# Altium PCB Adafruit Feather M0 Basic rev C.PcbDoc
Units mil, origin at the board's own origin, x right, y up, seen from the top; angles counter-clockwise.
Board outline 2000 x 900 mil, 2 copper layers (Top, Bottom), stack 61.811 mil thick; 37 components, 86 nets, 154 pads, 99 vias.
Unrouted connection lines stored in the file: 2.
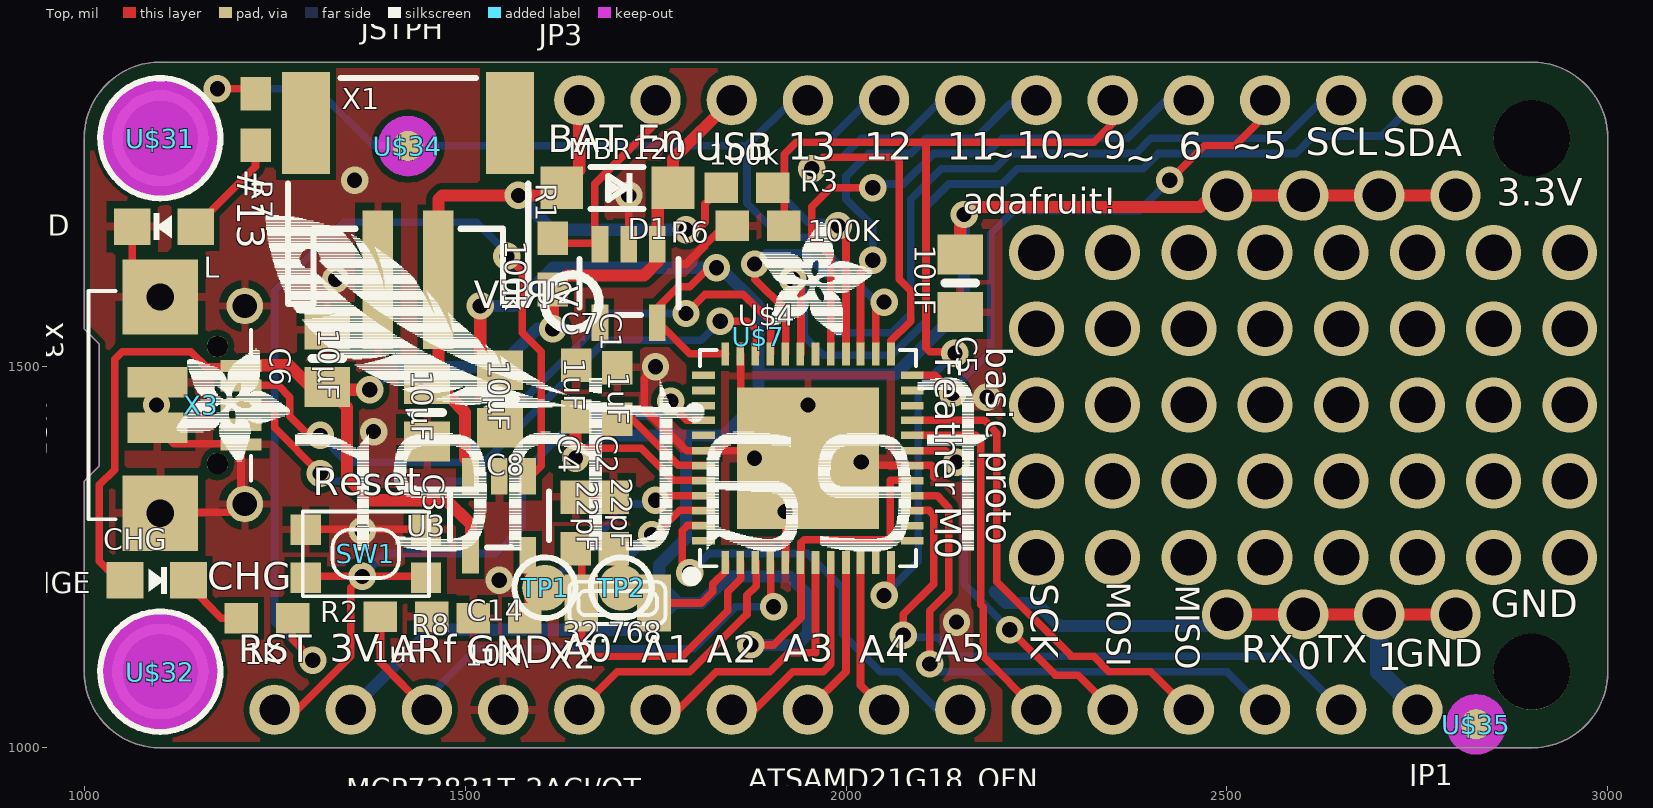
[diagram p0: Top view]
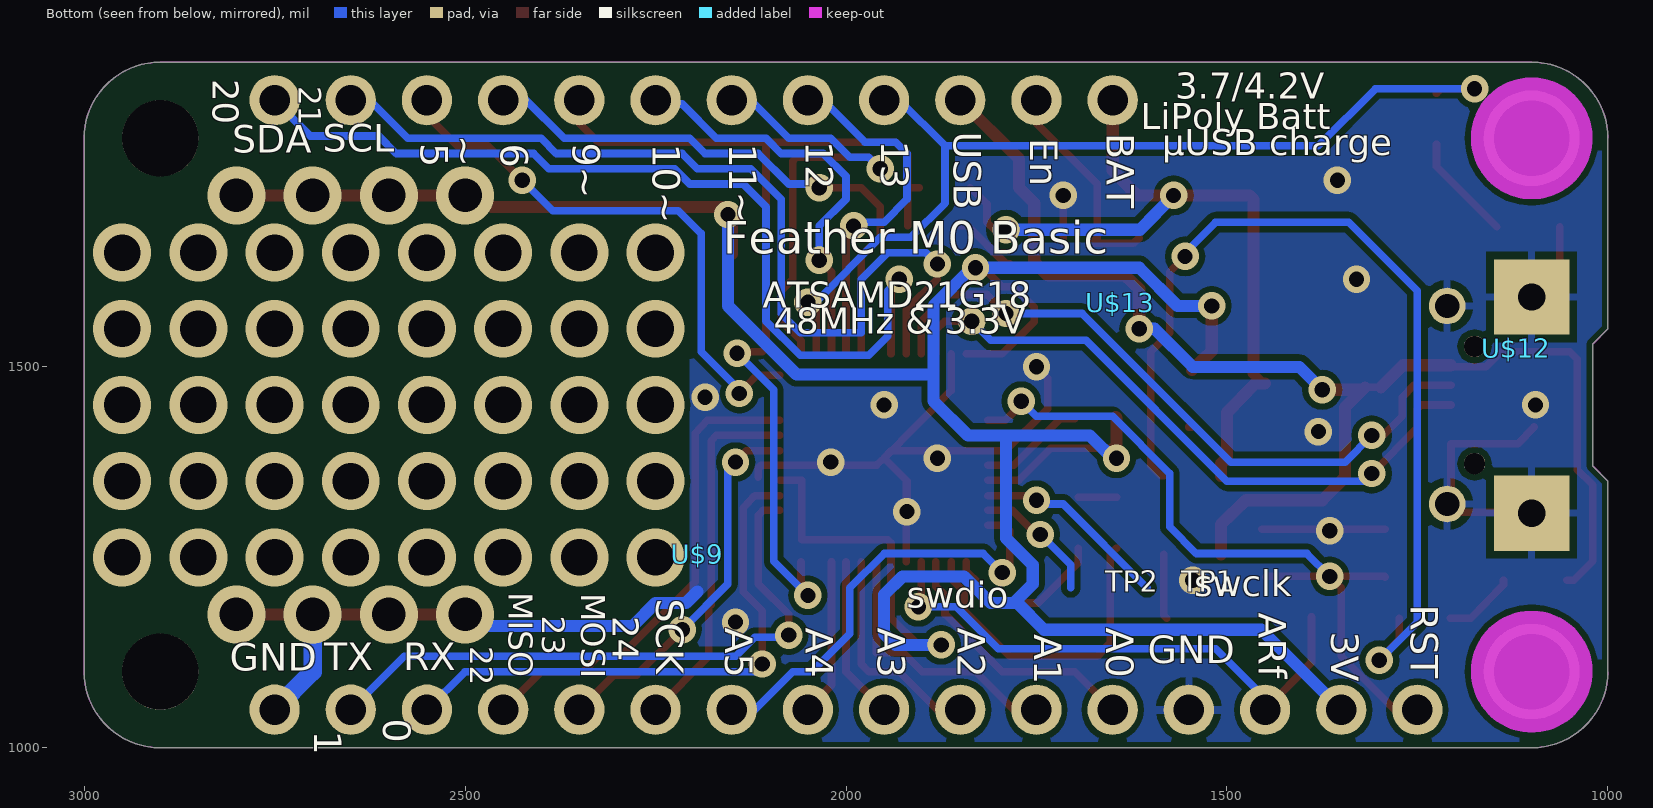
[diagram p1: Bottom view, seen from below]

## Layer stack, top to bottom
Top Solder: solder mask 0.4, Solder Resist, Dk 3.5
Top: signal copper 1.378
Dielectric 1: core 59.0551, FR-4, Dk 4.8
Bottom: signal copper 1.378
Bottom Solder: solder mask 0.4, Solder Resist, Dk 3.5

## Board outline
1100,1000 2900,1000 ccw(c2900,1100) 3000,1100 3000,1800 ccw(c2900,1800) 2900,1900 1100,1900 ccw(c1100,1800) 1000,1800 1000,1550 1020,1530 1020,1370 1000,1350 1000,1100 ccw(c1100,1100)

## Design rules (kind name [scope] priority, off if disabled: settings)
Clearance [All] p1: gap=8 except(0: SMDPad-SMDPad SMDPad-THPad SMDPad-Via)
Clearance "Clearance (Same Net)" [All] p2: gap=0 except(8: SMDPad-SMDPad SMDPad-THPad SMDPad-Via)
HoleSize HoleSize_1 [All] p1: absolutevalues=TRUE maxlimit=100000 minlimit=15.5 maxpercent=80.000 minpercent=20.000
HoleSize [All] p2: absolutevalues=TRUE maxlimit=100 minlimit=1 maxpercent=80.000 minpercent=20.000
HoleToHoleClearance mdViaViaSameLayer [All] p1: gap=8 allowstackedmicrovias=TRUE
HoleToHoleClearance [All] p2: gap=10 allowstackedmicrovias=TRUE
PasteMaskExpansion mlMinCreamFrame [All] p1: expansion=0
PasteMaskExpansion [All] p2: expansion=0
PolygonConnect ThermalVias [IsVia] p1: connectstyle=Direct reliefconductorwidth=10 reliefentries=4 polygonreliefangle="90 Angle" airgapwidth=10
PolygonConnect [All] p2: connectstyle=Relief reliefconductorwidth=10 reliefentries=4 polygonreliefangle="90 Angle" airgapwidth=10
RoutingVias [All] p1: holewidth=28 width=50 viastyle="Through Hole" minholewidth=28 minwidth=50 maxholewidth=28 maxwidth=50
SilkToSilkClearance [All] p1 off: silktosilkclearance=10
SilkToSolderMaskClearance [IsPad] p1 off: minsilkscreentomaskgap=10 clearancetoexposedcopper=TRUE
SolderMaskExpansion mlMinStopFrame [All] p1: expansion=2
SolderMaskExpansion [All] p2: expansion=4
Width Width_1 [All] p1: maxlimit=100000 minlimit=8 preferedwidth=10
Width [All] p2: maxlimit=10 minlimit=10 preferedwidth=10
25 further rules are at their usual default settings.

## Components (designator, comment, footprint, x,y, rotation, side; value= is the part's Value field where it differs from the comment)
C1 "1uF" 0603-NO 1700,1465 r90.02 top
C2 "22pF" 0603-NO 1695,1295 r90.02 top
C3 "10µF" 0805-NO 1450,1440 r270 top
C4 "22pF" 0603-NO 1645,1295 r90.02 top
C5 "10uF" 0805-NO 2150,1610 r270 top
C6 "10µF" 0805-NO 1319,1511 r90.02 top
C7 "1uF" 0603-NO 1646,1468 r90.02 top
C8 "10µF" 0805-NO 1546,1458 r270 top
C14 "1uF" 0603-NO 1422,1172 r0 top
CHG "ORANGE" CHIPLED_0805_NOOUTLINE 1095,1220 r270 top
D1 "MBR120" SOD-123 1700,1735 r180.01 top
JP1 "" 1X16_ROUND 2000,1050 r180.01 top
JP3 "" 1X12_ROUND 2200,1850 r0 top
L "RED" CHIPLED_0805_NOOUTLINE 1105,1684 r90.02 top
R1 "100k" 0603-NO 1615,1635 r90.02 top
R2 "1K" 0603-NO 1240,1170 r0 top
R3 "100k" 0603-NO 1870,1735 r0 top
R6 "100K" 0603-NO 1885,1685 r180.01 top
R7 "2.2K" 0603-NO 1225,1825 r270 top
R8 "10K\" 0603-NO 1545,1170 r180.01 top
SW1 "" KMR2 1370,1255 r180.01 top
TP1 "" TESTPOINT_ROUND_1.5MM 1605,1210 r180 bottom
TP2 "" TESTPOINT_ROUND_1.5MM 1705,1210 r180 bottom
U2 "SPX3819-3.3" SOT23-5 1715,1610 r180.01 top
U3 "MCP73831T-2ACI/OT" SOT23-5 1545,1305 r180.01 top
U$4 "ATSAMD21G18_QFN" TQFN48_7MM 1950,1380 r0 top
U$7 "" ADAFRUIT_3.5MM 1885,1540 r0 top
U$9 "" FEATHERLOGO 2195,1255 r180 bottom
U$12 "" ADAFRUIT_3.5MM 1120,1525 r359.99 bottom
U$13 "" PCBFEAT-REV-040 1640,1585 r180 bottom
U$31 "" MOUNTINGHOLE_2.5_PLATED 1100,1800 r270 top
U$32 "" MOUNTINGHOLE_2.5_PLATED 1100,1100 r270 top
U$34 "" FIDUCIAL_1MM 1425,1790 r270 top
U$35 "" FIDUCIAL_1MM 2827,1031 r270 top
X1 "JSTPH" JSTPH2 1425,1760 r0 top
X2 "32.768" XTAL3215 1700,1190 r0 top
X3 "microUSB" 4UCONN_20329_V2 1175,1450 r270 top

## Footprints (in the part's own frame and the unit in brackets; to place one, negate y for a bottom-side part, rotate by r counter-clockwise, add the part's x,y. Pads: shape width x height; smd on the part's side, far side on the other; paste and mask are expansions set on the pad)
1X12_ROUND [mil] "1X12_ROUND"
  round 66 hole 40: 1(-550,0) 2(-450,0) 3(-350,0) 4(-250,0) 5(-150,0) 6(-50,0) 7(50,0) 8(150,0) 9(250,0) 10(350,0) 11(450,0) 12(550,0)
1X16_ROUND [mil] "1X16_ROUND"
  round 66 hole 40: 1(-750,0) 2(-650,0) 3(-550,0) 4(-450,0) 5(-350,0) 6(-250,0) 7(-150,0) 8(-50,0) 9(50,0) 10(150,0) 11(250,0) 12(350,0) 13(450,0) 14(550,0) 15(650,0) 16(750,0)
4UCONN_20329_V2 [mil] "4UCONN_20329_V2"
  round 28 hole 28: 1(-76.77,0) 1(77,0)
  rect 40x79 smd: BASE@1(-29.53,-78.74) BASE@2(30,-78.74)
  rect 16x54 smd: D+(0,31) D-(-25.59,31) GND(52,31) ID(26,31) VBUS(-51.18,31)
  round 48 hole 32: SPRT@1(-129.92,36) SPRT@2(130,36)
  rect 99x99 hole 36: SPRT@3(-141.73,-74.8) SPRT@4(142,-74.8)
  silkscreen extent -150,-169 150,44
0603-NO [mil] "0603-NO"
  rect 44x40 smd: 1(-33.46,0) 2(34,0)
0805-NO [mil] "0805-NO"
  rect 52x60 smd: 1(-37.4,0) 2(38,0)
  silkscreen extent 0,-20 0,20
ADAFRUIT_3.5MM [mil] "ADAFRUIT_3.5MM"
  silkscreen extent 1,1 150,150
CHIPLED_0805_NOOUTLINE [mil] "CHIPLED_0805_NOOUTLINE"
  rect 48x48 smd: A(0,-41.34) C(0,42)
  silkscreen extent -17,-10 18,14
FEATHERLOGO [mil] "FEATHERLOGO"
FIDUCIAL_1MM [mil] "FIDUCIAL_1MM"
  rrect100% 40x40 smd: 1(0,0)
  Top keep-out lines w20: 0,-29.53 cw(c0,0) -29.53,0 cw(c0.24,0.24) 0,30 cw(c0,0) 30,0 cw(c0.24,0.24) 0,-29.53
JSTPH2 [mil] "JSTPH2"
  rect 40x182 smd: 1(-39.37,-145.67) 2(40,-145.67)
  rect 63x134 smd: NC1(-133.86,60) NC2(134,60)
  silkscreen extent -157,-177 158,119
KMR2 [mil] "KMR2"
  rect 40x40 smd: 1(79,32) 2(79,-31.5) 3(-78.74,32) 4(-78.74,-31.5)
  silkscreen extent -83,-55 83,56
MOUNTINGHOLE_2.5_PLATED [mil] "MOUNTINGHOLE_2.5_PLATED"
  round 126 hole 99: P$1(0,0)
  Top keep-out lines w80: 40,0 ccw(c0,0) 40,0
  Bottom keep-out lines w80: 40,0 ccw(c0,0) 40,0
  silkscreen extent -79,-79 79,79
PCBFEAT-REV-040 [mil] "PCBFEAT-REV-040"
SOD-123 [mil] "SOD-123"
  rect 56x56 smd: A(73,0) C(-72.83,0)
  silkscreen extent -34,-28 35,28
SOT23-5 [mil] "SOT23-5"
  rect 22x48 smd: 1(-37.4,-51.19) 2(0,-51.19) 3(38,-51.19) 4(38,52) 5(-37.4,52)
  silkscreen extent -65,-31 65,42
TESTPOINT_ROUND_1.5MM [mil] "TESTPOINT_ROUND_1.5MM"
  rrect100% 60x60 smd far side: P$1(0,0)
TQFN48_7MM [mil] "TQFN48_7MM"
  rect 10x30 smd: 1(-108.27,-136.81) 2(-88.58,-136.81) 3(-68.9,-136.81) 4(-49.21,-136.81) 5(-29.53,-136.81) 6(-9.84,-136.81) 7(10,-136.81) 8(30,-136.81) 9(50,-136.81) 10(69,-136.81) 11(89,-136.81) 12(109,-136.81) 25(109,137) 26(89,137) 27(69,137) 28(50,137) 29(30,137) 30(10,137) 31(-9.84,137) 32(-29.53,137) 33(-49.21,137) 34(-68.9,137) 35(-88.58,137) 36(-108.27,137)
  rect 30x10 smd: 13(137,-108.27) 14(137,-88.58) 15(137,-68.9) 16(137,-49.21) 17(137,-29.53) 18(137,-9.84) 19(137,10) 20(137,30) 21(137,50) 22(137,69) 23(137,89) 24(137,109) 37(-136.81,109) 38(-136.81,89) 39(-136.81,69) 40(-136.81,50) 41(-136.81,30) 42(-136.81,10) 43(-136.81,-9.84) 44(-136.81,-29.53) 45(-136.81,-49.21) 46(-136.81,-68.9) 47(-136.81,-88.58) 48(-136.81,-108.27)
  rect 186x186 smd: THERMAL(0,0)
  silkscreen extent -158,-160 142,142
XTAL3215 [mil] "XTAL3215"
  rect 44x75 smd: P$1(48,0) P$2(-47.24,0)
  silkscreen extent -63,-28 63,28

## Part data
C1 C2 C4 C7 C14 R1 R2 R3 R6 R7 R8: library part 0603-NO
C3 C5 C6 C8: library part 0805-NO
CHG L: library part CHIPLED_0805_NOOUTLINE
D1: library part SOD-123
JP1: library part 1X16_ROUND
JP3: library part 1X12_ROUND
SW1: library part KMR2
TP1 TP2: library part TESTPOINT_ROUND_1.5MM
U2 U3: library part SOT23-5
U$4: library part TQFN48_7MM
U$7 U$12: library part ADAFRUIT_3.5MM
U$9: library part FEATHERLOGO
U$13: library part PCBFEAT-REV-040
U$31 U$32: library part MOUNTINGHOLE_2.5_PLATED
U$34 U$35: library part FIDUCIAL_1MM
X1: library part JSTPH2
X2: library part XTAL3215
X3: library part 4UCONN_20329_V2

## Free pads (board coordinates)
  round 100 hole 100: 1(2900,1100) 1(2900,1800)

## Via types
v1: diameter 36/36 (per signal layer), hole 20, Top to Bottom, 51 vias
v2: diameter 72/76 (per signal layer), hole 48, Top to Bottom, 40 vias
v3: diameter 66/76 (per signal layer), hole 44, Top to Bottom, 8 vias

## Nets (pads, with @x,y where several pads share a name; then routed paths per layer and width w, separated by ;. In a path a pad name is that pad's centre, name@x,y a point inside that pad or via, vN(x,y) a via of type N, cw(c..) or ccw(c..) an arc to the next point about the centre after c; other vN are vias at no path point)
!RESET: JP1.16 SW1.1 SW1.3 U$4.40 | length 1001.3
  Top w10: JP1.16@1255,1050 1250,1050 1280,1050 1350,1120 1350,1210 v1(1365,1225) ; SW1.1@1292,1224 1293,1225 v1(1365,1225) ; SW1.3@1449,1224 1448,1225 v1(1365,1225) ; v1(1770,1455) 1770,1450 1791,1430 U$4.40@1814,1430
  Bottom w10: v1(1365,1225) 1395,1255 1540,1255 1575,1290 1575,1360 1650,1435 1750,1435 v1(1770,1455)
+3V3: C5.1 C7.1 C8.1 JP1.15 U2.5 U$4.6 U$4.17 U$4.36 U$4.44 | length 4066.1
  Top w10: v1@1646,1396 1646,1434 1646,1400 1653,1393 1731,1393 1773,1351 U$4.44@1814,1351 ; v1(1830,1630) 1820,1630 1795,1605 1780,1605 1753,1578 1753,1559 1795,1517 U$4.36@1842,1517 ; v1(1875,1135) 1905,1135 1941,1171 1941,1244 1941,1269 1945,1273 2058,1273 2058,1351 U$4.17@2087,1351
  Top w16: v1(1520,1580) 1520,1521 C8.1@1546,1496 ; v1(1645,1380) 1645,1433 C7.1@1646,1434 ; C5.1@2150,1648 2150,1695 v1(2155,1700) 2155,1710 2465,1710 2480,1725 v3(2500,1725) ; v3@2490,1715 v3(2500,1725) ; v3(2800,1725) v3(2700,1725) v3(2600,1725) v3(2500,1725)
  Bottom w10: v1(1830,1630) v1@1835,1630
  Bottom w16: JP1.15@1350,1050 1455,1155 1740,1155 1775,1190 1775,1195 ; v1(1520,1580) 1565,1580 1615,1630 v1(1830,1630) ; v1(1645,1380) 1645,1375 1680,1410 1790,1410 ; v1@1835,1630 1885,1580 1885,1495 ; v1(1875,1135) 1935,1135 1950,1150 1950,1201 1926,1225 1845,1225 1810,1190 1780,1190 1775,1195 ; v1(2155,1700) 2155,1580 2065,1490 1890,1490 1885,1495 ; 1775,1195 1755,1215 1755,1240 1790,1275 1790,1410 ; 1790,1410 1840,1410 1885,1455 1885,1495
A0: JP1.12 U$4.3 | length 345.7
  Top w10: JP1.12@1650,1050 1700,1100 1795,1100 1870,1175 1870,1200 1882,1212 U$4.3@1882,1244
A1: JP1.11 U$4.7 | length 360.1
  Top w10: JP1.11 1780,1050 1830,1100 1900,1100 1925,1125 1960,1125 1960,1170 U$4.7@1960,1244
A2: JP1.10 U$4.8 | length 298.9
  Top w10: JP1.10@1860,1050 JP1.10 1880,1050 1930,1100 1970,1100 1980,1110 U$4.8@1980,1244
A3: JP1.9 U$4.9 | length 214.7
  Top w10: JP1.9 2000,1100 U$4.9@2000,1244
A4: JP1.8 U$4.10 | length 206.6
  Top w10: U$4.10@2019,1244 2019,1082 JP1.8
A5: JP1.7 U$4.47 | length 576.5
  Top w10: v1(1795,1230) 1785,1240 1785,1285 1792,1292 U$4.47@1814,1292
  Bottom w10: v1(1795,1230) 1820,1255 1950,1255 1995,1210 1995,1150 2045,1100 2070,1100 2120,1050 JP1.7
AREF: C14.1 JP1.14 U$4.4 | length 747.1
  Top w10: C14.1@1389,1172 1389,1112 JP1.14@1450,1050 ; U$4.4@1901,1244 1901,1190 v1(1905,1185)
  Bottom w10: JP1.14@1450,1070 1450,1050 1450,1065 1515,1130 1800,1130 1855,1185 v1(1905,1185)
D0: JP1.3 U$4.16 | length 735.1
  Top w10: U$4.16@2087,1331 2120,1331 2135,1315 2135,1205 2110,1180 v1(2110,1110)
  Bottom w10: v1(2110,1110) 2120,1100 2500,1100 JP1.3@2550,1050
D1: JP1.2 U$4.15 | length 822.1
  Top w10: v1(2075,1148) 2075,1175 2115,1215 2115,1305 2109,1312 U$4.15@2087,1312
  Bottom w10: v1(2075,1148) 2075,1145 2120,1145 2145,1120 2580,1120 JP1.2@2650,1050
D2: U$4.23
D3: U$4.14
D4: U$4.13
D5: JP3.10 U$4.24 | length 745.2
  Top w10: U$4.24 2117,1489 v1(2140,1465) ; v1(2425,1745) 2470,1790 2510,1790 2550,1830 JP3.10
  Bottom w10: v1(2140,1465) 2135,1465 2190,1520 2190,1675 2220,1705 2385,1705 v1(2425,1745)
D6: JP3.9 U$4.29 | length 756.6
  Top w10: U$4.29 1980,1646 1955,1670 1955,1710 1980,1735 v1(2035,1735)
  Bottom w10: v1(2035,1735) 2040,1740 2075,1740 2115,1780 2185,1780 2205,1800 2370,1800 2420,1850 JP3.9
D7: U$4.30
D8: U$4.11
D9: JP3.8 R3.2 R6.1 U$4.12 | length 1301.9
  Top w10: R3.2 R3.2@1919,1735 ; R6.1@1919,1685 R3.2@1919,1735 ; v1(2050,1200) 2059,1209 U$4.12@2059,1244 ; v1(2143,1518) 2140,1520 2110,1520 2105,1525 2105,1795 ; JP3.8 2350,1820 2325,1795 2105,1795 ; R3.2@1919,1735 1919,1779 1935,1795 2105,1795
  Bottom w10: v1(2050,1200) 2095,1245 2095,1470 v1(2143,1518)
D10: JP3.7 U$4.27 | length 545.5
  Top w10: U$4.27 2019,1624 v1(2035,1640)
  Bottom w10: v1(2035,1640) 2035,1685 2000,1720 2000,1750 2030,1780 2085,1780 2105,1800 2170,1800 2215,1845 2245,1845 JP3.7
D11: JP3.6 U$4.25 | length 625.5
  Top w10: v1(1955,1760) 1970,1775 2065,1775 2070,1770 2070,1615 2085,1600 2085,1560 2059,1534 U$4.25
  Bottom w10: v1(1955,1760) 1970,1775 1995,1775 2020,1800 2075,1800 2125,1850 JP3.6
D12: JP3.5 U$4.28 | length 475.9
  Top w10: v1(1990,1685) 2000,1676 U$4.28
  Bottom w10: v1(1990,1685) 1985,1690 1950,1690 1920,1720 1920,1780 1935,1795 1975,1795 2030,1850 JP3.5
D13: JP3.4 R7.1 U$4.26 | length 1264.8
  Top w10: v1(1175,1865) 1219,1865 R7.1@1225,1859 ; U$4.26 2039,1574 v1(2050,1585)
  Bottom w10: v1(1175,1865) 1305,1865 1380,1790 1870,1790 ; JP3.4 1930,1850 1870,1790 ; v1(2050,1585) 2040,1585 1955,1670 1915,1670 1870,1715 1870,1790
D+: U$4.34 X3.D+ | length 855.3
  Top w10: X3.D+ 1245,1450 1250,1445 1250,1420 v1(1310,1360) ; v1(1835,1560) 1870,1560 1882,1549 U$4.34@1882,1517
  Bottom w10: v1(1310,1360) 1320,1350 1500,1350 1685,1535 1810,1535 v1(1835,1560)
D-: U$4.33 X3.D- | length 900.1
  Top w10: X3.D-@1206,1476 1255,1476 1270,1460 1270,1435 1295,1410 v1(1310,1410) ; v1(1790,1570) 1815,1595 1865,1595 1901,1560 U$4.33@1901,1517
  Bottom w10: v1(1310,1410) 1345,1375 1495,1375 1690,1570 v1(1790,1570)
EN: JP3.2 R1.2 U2.3 | length 290.4
  Top w10: R1.2 1623,1662 1678,1662 1670,1669 1670,1740 1750,1820 JP3.2
GND: C1.2 C2.2 C3.2 C4.2 C5.2 C6.2 C7.2 C8.2 C14.2 JP1.1 JP1.13 L.C R6.2 R8.2 SW1.2 SW1.4 U2.2 U3.2 U$4.5 U$4.18 U$4.35 U$4.42 U$4.THERMAL X1.1 X3.BASE@1 X3.BASE@2 X3.GND X3.SPRT@1 X3.SPRT@2 X3.SPRT@3 X3.SPRT@4 | length 2411.3
  Top w10: L.C 1063,1592 1101,1592 ; 1097,1421 1118,1399 1206,1399 1206,1325 1211,1321 1199,1309 1101,1309 ; SW1.2@1292,1287 1449,1287 SW1.4@1454,1287 ; C8.2@1546,1421 C8.2@1550,1421 ; C4.2 C2.2 ; U2.2@1715,1662 v1@1715,1710 ; v1(1750,1500) 1735,1485 1735,1445 1791,1390 1814,1390 1941,1390 U$4.THERMAL ; 1785,1635 1790,1635 1840,1685 R6.2@1852,1685 ; U$4.35@1862,1517 1862,1469 U$4.THERMAL ; v1(1920,1310) 1920,1350 U$4.THERMAL@1921,1351 ; U$4.5@1921,1244 U$4.THERMAL@1921,1351 ; 2110,1370 2110,1371 2087,1371 1960,1371 U$4.THERMAL ; 2115,1355 2115,1365 ; U$4.THERMAL@1921,1351 U$4.THERMAL
  Top w16: v3(2500,1175) v3(2600,1175) v3(2700,1175) v3(2800,1175)
  Bottom w16: 2195,1205 2210,1190 2250,1190 2280,1160 2485,1160 v3(2500,1175)
  Bottom w24: v3(2700,1175) 2700,1100 JP1.1@2750,1050
  other v1: 2145,1165 1545,1220 1365,1285 2020,1375 1880,1380 1380,1415 1095,1450 1950,1450 2185,1460 1330,1615 1715,1725 1355,1745
MISO: JP1.4 U$4.21 | length 635.9
  Top w10: U$4.21 2182,1430 2198,1413 2198,1218 2296,1120 ; 2295,1120 2296,1120 ; JP1.4@2450,1050 2400,1100 2345,1100 2325,1120 2305,1120 2296,1120
MOSI: JP1.5 U$4.19 | length 492
  Top w10: U$4.19 2131,1390 v1(2145,1375) ; v1(2215,1155) 2275,1095 2305,1095 JP1.5@2350,1050
  Bottom w10: v1(2145,1375) 2155,1365 2155,1215 v1(2215,1155)
N$1: CHG.C R2.1 | length 94.5
  Top w10: CHG.C 1137,1214 1180,1170 R2.1@1207,1170
N$2: L.A R7.2 | length 140.7
  Top w10: L.A@1146,1684 1225,1763 R7.2@1225,1792
N$3: R2.2 U3.1 | length 1251.1
  Top w10: R2.2 1274,1142 v1(1300,1115) ; v1(1555,1645) 1575,1625 1575,1545 1600,1520 1600,1370 1587,1357 U3.1@1583,1357
  Bottom w10: v1(1300,1115) 1250,1165 1250,1600 1340,1690 1515,1690 1555,1650 v1(1555,1645)
N$4: R8.1 U3.5 | length 85.7
  Top w10: R8.1@1579,1170 1583,1174 U3.5@1583,1254
N$5: C2.1 U$4.1 X2.P$1 | length 223.2
  Top w10: C2.1@1695,1262 1695,1243 X2.P$1 1810,1190 1825,1205 1825,1215 1842,1232 U$4.1@1842,1244
N$6: 
  other v2: 2250,1350
N$7: C4.1 U$4.2 X2.P$2 | length 423
  Top w10: C4.1@1645,1262 1653,1254 1653,1190 1653,1138 1670,1120 1785,1120 1845,1180 1845,1205 1862,1222 U$4.2@1862,1244
N$8: 
  other v2: 2750,1650
N$9: 
  other v2: 2750,1550
N$10: 
  other v2: 2850,1550
N$11: 
  other v2: 2850,1650
N$12: 
  other v2: 2950,1650
N$13: 
  other v2: 2950,1550
N$14: 
  other v2: 2950,1450
N$15: 
  other v2: 2950,1350
N$16: 
  other v2: 2850,1350
N$17: 
  other v2: 2850,1450
N$18: 
  other v2: 2750,1450
N$19: 
  other v2: 2750,1350
N$20: 
  other v2: 2750,1250
N$21: 
  other v2: 2850,1250
N$22: 
  other v2: 2250,1250
N$24: 
  other v2: 2650,1250
N$25: 
  other v2: 2650,1350
N$26: 
  other v2: 2650,1450
N$27: 
  other v2: 2650,1550
N$28: 
  other v2: 2650,1650
N$30: 
  other v2: 2550,1650
N$31: 
  other v2: 2550,1550
N$32: 
  other v2: 2550,1450
N$33: 
  other v2: 2550,1350
N$34: 
  other v2: 2550,1250
N$35: 
  other v2: 2450,1250
N$36: 
  other v2: 2450,1350
N$37: 
  other v2: 2450,1450
N$38: 
  other v2: 2450,1550
N$39: 
  other v2: 2450,1650
N$40: 
  other v2: 2350,1650
N$41: 
  other v2: 2350,1550
N$42: 
  other v2: 2350,1450
N$43: 
  other v2: 2350,1350
N$44: 
  other v2: 2350,1250
N$45: 
  other v2: 2950,1250
N$46: 
  other v2: 2250,1550
N$47: 
  other v2: 2250,1450
N$48: 
  other v2: 2250,1650
PB03/I3/AIN11/SERCOM5.1: 
PB22/I6/SERCOM5.2: 
PB23/I7/SERCOM5.3: 
SCK: JP1.6 U$4.20 | length 476.1
  Top w10: U$4.20 2088,1410 2170,1410 2177,1403 2177,1188 2180,1185 2180,1120 JP1.6
SCL: JP3.11 U$4.32 | length 1215.2
  Top w10: v1@1880,1630 v1(1880,1635) 1880,1615 1921,1575 U$4.32@1921,1517
  Bottom w10: v1(1880,1635) 1895,1650 1945,1650 1980,1615 1980,1545 2060,1545 2085,1570 2085,1720 2125,1760 2195,1760 2215,1780 2380,1780 2400,1800 2575,1800 2625,1850 JP3.11
SDA: JP3.12 U$4.31 | length 1226.1
  Top w10: v1(1930,1615) 1941,1605 U$4.31@1941,1517
  Bottom w10: v1(1930,1615) 1945,1600 1945,1540 1970,1515 2060,1515 2105,1560 2105,1710 2135,1740 2205,1740 2225,1760 2390,1760 2410,1780 2590,1780 2613,1803 2703,1803 JP3.12
SWCLK: TP1.P$1 U$4.45 | length 259.1
  Top w10: v1(1750,1325) 1756,1331 U$4.45@1814,1331
  Bottom w10: 1605,1210 1715,1320 1745,1320 v1(1750,1325)
SWDIO: TP2.P$1 U$4.46 | length 173.8
  Top w10: v1(1745,1280) 1750,1280 1782,1312 U$4.46@1814,1312
  Bottom w10: 1705,1210 1705,1240 v1(1745,1280) v1@1750,1280
VBAT: C3.1 D1.A JP3.1 R3.1 U3.3 X1.2 | length 1016.4
  Top w10: C3.1@1450,1478 C3.1@1465,1492 ; v1(1790,1680) 1805,1680 1815,1690 1815,1714 R3.1@1837,1735
  Top w16: C3.1@1450,1478 1463,1478 1500,1440 1500,1380 1508,1373 U3.3@1508,1357 ; C3.1@1465,1492 1465,1615 1465,1720 1470,1725 v1(1570,1725) 1617,1725 1628,1735 1650,1758 JP3.1
  Bottom w16: v1(1570,1725) 1614,1680 v1(1790,1680)
VBUS: C6.1 CHG.A D1.C JP3.3 R1.1 U2.1 U3.4 X3.VBUS | length 1765.7
  Top w10: CHG.A@1054,1220 1045,1220 1020,1245 1020,1345 1040,1365 1040,1510 1050,1520 1140,1520 1160,1500 1205,1500 X3.VBUS@1206,1502 ; C6.1@1298,1473 1319,1473 C6.1@1322,1470
  Top w16: X3.VBUS@1206,1502 1269,1502 C6.1@1298,1473 ; C6.1@1319,1473 1345,1447 1345,1355 1375,1325 1475,1325 1508,1293 U3.4@1508,1254 ; C6.1@1322,1470 v1(1375,1470) ; v1(1615,1550) 1615,1602 1634,1620 1735,1620 1753,1638 1753,1662 1753,1715 1773,1735 1773,1773 JP3.3
  Bottom w16: v1(1375,1470) 1405,1500 1545,1500 1595,1550 v1(1615,1550)
VDDCORE: C1.1 U$4.43 | length 139.3
  Top w10: C1.1@1700,1432 1719,1432 1780,1371 U$4.43@1814,1371
pads on no net: U2.4 U$4.22 U$4.37 U$4.38 U$4.39 U$4.41 U$4.48 U$31.P$1 U$32.P$1 U$34.1 U$35.1 X1.NC1 X1.NC2 X3.1 X3.ID
copper on no net: | length 8.7
  Top w10: 2110,1371 cw(c2109.5,1365.5) 2115,1365

## Polygon pours and split planes (outlines as drawn)
GND on Top "Top-GND" (solid, remove dead copper, pour order 0): 995,1905 995,995 2205,995 2205,1905
GND on Bottom "Bottom-GND" (solid, remove dead copper, pour order 2): 2205,995 995,995 995,1905 2205,1905

## Keep-outs
Keep-Out Layer:
  the board outline again, w0

## Silkscreen, mask and mechanical layers (free items; w line width, h text height)
Top Overlay:
  text "BAT" at 1608.67,1770.14 h62 r0.01
  text "En" at 1725.18,1770.14 h62 r0.01
  text "SCL" at 2603.32,1765.76 h62 r0.01
  text "SDA" at 2704.24,1764.47 h62
  text "10" at 2223.48,1761.06 h62 r0.01
  text "9" at 2336.93,1761.06 h62 r0.01
  text "~5" at 2505.68,1761.38 h62 r0.01
  text "#13" at 1189.5,1759.75 h62 r270
  text "13" at 1923.42,1759.76 h62
  text "12" at 2023.63,1760.08 h62 r0.01
  text "11" at 2132.26,1760.08 h62 r0.01
  text "6" at 2436.87,1759.76 h62
  text "USB" at 1801.63,1759.47 h62
  text "~" at 2181.14,1750.36 h62 r0.01
  text "~" at 2281.14,1750.36 h62 r0.01
  text "~" at 2366.14,1745.36 h62 r0.01
  text "adafruit!" at 2153.46,1701.09 h34
  text "3.3V" at 2854.33,1699.76 h62
  text "basic proto" at 2184.03,1526.53 h34 r270.02
  text "Feather M0" at 2117.04,1512.36 h34 r270.02
  text "Reset" at 1299.97,1319.82 h62
  text "MOSI" at 2332.04,1218 h54.25 r270
  text "SCK" at 2230.75,1215.69 h62 r270.02
  text "MISO" at 2422.04,1214.08 h54.25 r270
  text "CHG" at 1161.5,1195.76 h62 r0.01
  text "GND" at 2846.32,1159.47 h62
  text "RST" at 1202.29,1100.76 h62 r0.01
  text "3V" at 1322.46,1101.06 h62 r0.01
  text "A0" at 1627.38,1101.06 h62 r0.01
  text "A3" at 1917.32,1101.06 h62 r0.01
  text "A5" at 2117.17,1101.11 h62 r0.01
  text "ARf" at 1402.8,1099.81 h62 r0.01
  text "A1" at 1731.15,1100.08 h62 r0.01
  text "A2" at 1817.52,1100.08 h62 r0.01
  text "A4" at 2017.38,1100.14 h62 r0.01
  text "RX" at 2518.87,1100.14 h62 r0.01
  text "TX" at 2620.43,1100.14 h62 r0.01
  text "GND" at 1501.32,1099.47 h62
  text "GND" at 2721.32,1094.47 h62
  text "0" at 2592.05,1091.06 h62 r0.01
  text "1" at 2697.68,1090.09 h62
Bottom Overlay:
  text "20" at 2831.08,1877.4 h34 r90
  text "21" at 2718.44,1868.4 h29.75 r90
  text "3.7/4.2V" at 1568.04,1851.59 h34
  text "LiPoly Batt" at 1613.35,1811.92 h34
  text "USB" at 1870.53,1808.36 h62 r90
  text "BAT" at 1669.86,1806.33 h62 r90
  text "~" at 2529.64,1803.85 h62 r89.98
  text "En" at 1769.85,1799.82 h62 r90
  text "13" at 1965.24,1796.58 h62 r90
  text "12" at 2064.91,1796.37 h62 r90
  text "9~" at 2370.24,1794.32 h62 r90
  text "11~" at 2164.91,1792.89 h62 r90
  text "10~" at 2265.24,1792.89 h62 r90
  text "6" at 2465.24,1793.13 h62 r90
  text "5" at 2569.91,1793.16 h62 r90
  text "µUSB charge" at 1585.03,1777.92 h34
  text "SCL" at 2686.68,1770.76 h62 r359.99
  text "SDA" at 2805.76,1769.47 h62
  text "Feather M0 Basic" at 2161.25,1648.23 h42.5
  text "ATSAMD21G18" at 2109.02,1577.59 h34
  text "48MHz & 3.3V" at 2094.86,1543.59 h34
  text "MISO" at 2452.96,1204.08 h54.25 r90
  text "MOSI" at 2357.96,1203 h54.25 r90
  text "swclk" at 1542.72,1198.93 h34
  text "SCK" at 2260.53,1195.7 h62 r90
  text "RST" at 1270.53,1187.72 h62 r90
  text "swdio" at 1920.56,1183.93 h34
  text "ARf" at 1470.18,1177.2 h62 r90
  text "23" at 2398.44,1173.35 h29.75 r90
  text "24" at 2306.08,1172.4 h34 r90
  text "A0" at 1670.24,1157.63 h62 r90
  text "A3" at 1970.24,1157.69 h62 r90
  text "A4" at 2064.85,1157.63 h62 r90
  text "A5" at 2170.18,1157.83 h62 r90
  text "A2" at 1864.91,1157.48 h62 r90
  text "3V" at 1375.24,1152.54 h62 r90
  text "A1" at 1764.91,1148.85 h62 r90
  text "22" at 2493.44,1133.35 h29.75 r90
  text "GND" at 1603.68,1099.47 h62
  text "RX" at 2581.13,1090.14 h62 r359.99
  text "TX" at 2684.57,1090.14 h62 r359.99
  text "GND" at 2808.68,1089.47 h62
  text "0" at 2618.94,1037.94 h62 r89.98
  text "1" at 2709.91,1022.32 h62 r90

## Dimensions
2200,1850 to 2000,1050 on Measures
1140,1000 to 1175,1450 on Measures
1145,1000 to 1205,1900 on Measures
2900,1100 to 2900,1800 on Measures
1055,1095 to 1150,1095 on Measures
2900,1850 to 2905,1750 on Measures
1000,1770 to 1650,1850 on Measures
1000,1825 to 1425,1760 on Measures
1100,1100 to 2900,1100 on Measures
1000,1740 to 3000,1580 on Measures

## Text inside footprints (layer, text, board x,y; h text height)
CHG: tDocu "C" at 1143,1223.94 h15.5 r270; tDocu "A" at 1039.88,1223.94 h15.5 r270
L: tDocu "C" at 1057,1680.05 h15.5 r90.02; tDocu "A" at 1160.12,1680.08 h15.5 r90.02
U$13: Top Overlay ">REV" at 1654,1565 h62
X3: tDocu "PCB EDGE" at 1017.52,1449.99 h24.8 r270